# EAGLE board ArduinoConnector (EAGLE 6.1)
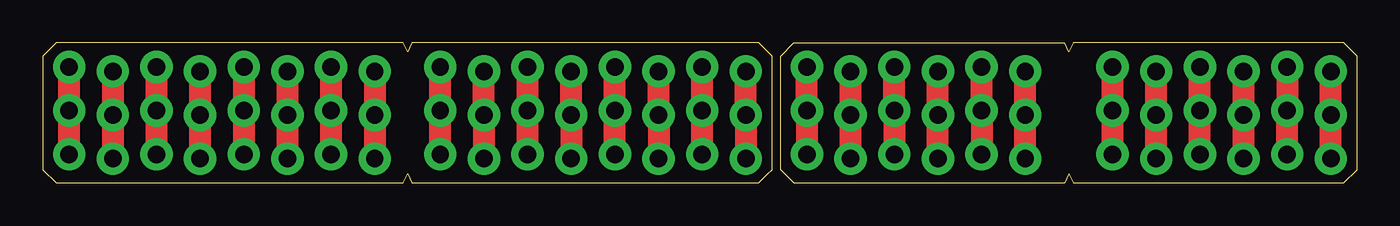
[diagram p0: board, top side]
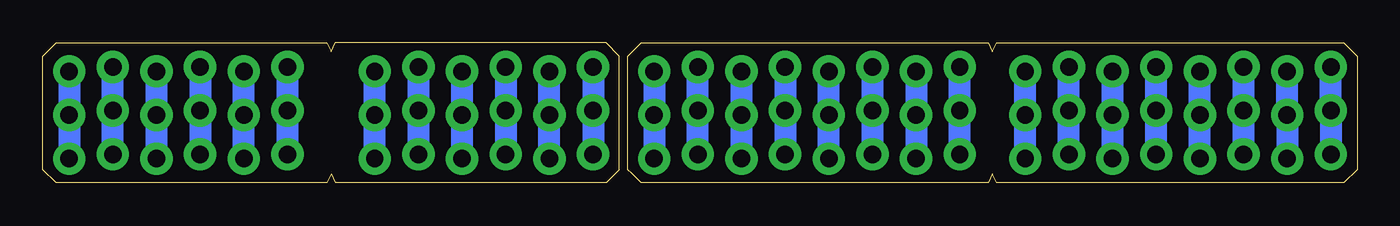
[diagram p1: board, bottom side, seen from below]

Size 76.45 x 8.13 mm. Coordinates in mm from the lower left corner, seen from the top.
Outline: 0.76,8.13 0.25,7.62 0,7.37 0,0.76 0.76,0 20.95,0 21.21,0.51 21.46,0 41.66,0 42.16,0.51 42.42,0.76 42.42,7.37 41.66,8.13 21.46,8.13 21.21,7.62 20.95,8.13 0.76,8.13
Outline: 42.93,0.76 42.93,7.37 43.69,8.13 59.44,8.13 59.69,7.62 59.94,8.13 75.69,8.13 76.45,7.37 76.45,0.76 75.69,0 59.94,0 59.69,0.51 59.44,0 43.69,0 42.93,0.76
Copper layers (1*16): Top 0.0356mm / dielectric 1.5011mm / Bottom 0.0356mm
Design rules: minimum track width 9mil, minimum drill 18mil, track to track 9mil, track to pad 9mil, pad to pad 9mil, via to via 9mil, smd to smd 9mil, copper to edge 10mil, drill to drill 9mil, minimum pad ring 10mil, minimum via ring 8mil, stop-mask expansion 4mil, vias tented up to drill 25mil, thermal gap 10mil

## Footprints (pad centres in the part's own frame; a part is rotated, then mirrored left to right if it is on the bottom)
1X08_LOCK_NOSCREEN = drill 1.016 pad 1.88: 1 0,0.127; 2 2.54,-0.127; 3 5.08,0.127; 4 7.62,-0.127; 5 10.16,0.127; 6 12.7,-0.127; 7 15.24,0.127; 8 17.78,-0.127
1X06_LOCK_NOSCREEN = drill 1.016 pad 1.88: 1 0,0.127; 2 2.54,-0.127; 3 5.08,0.127; 4 7.62,-0.127; 5 10.16,0.127; 6 12.7,-0.127

## Placement (x,y rotation side)
JP1  [1X08_LOCK_NOSCREEN]  23.11,6.6 0 top
JP2  [1X08_LOCK_NOSCREEN]  1.52,6.6 0 top
JP3  [1X06_LOCK_NOSCREEN]  44.45,6.6 0 top
JP4  [1X08_LOCK_NOSCREEN]  23.11,4.06 0 top
JP5  [1X08_LOCK_NOSCREEN]  1.52,4.06 0 top
JP6  [1X08_LOCK_NOSCREEN]  1.52,1.52 0 top
JP7  [1X06_LOCK_NOSCREEN]  44.45,4.06 0 top
JP8  [1X06_LOCK_NOSCREEN]  44.45,1.52 0 top
JP9  [1X08_LOCK_NOSCREEN]  23.11,1.52 0 top
JP10  [1X06_LOCK_NOSCREEN]  62.23,6.6 0 top
JP11  [1X06_LOCK_NOSCREEN]  62.23,4.06 0 top
JP12  [1X06_LOCK_NOSCREEN]  62.23,1.52 0 top

## Library data of the parts
JP1-JP12 = 1dah

## Nets
N$1: JP2.1 JP5.1 JP6.1
N$2: JP2.2 JP5.2 JP6.2
N$3: JP2.3 JP5.3 JP6.3
N$4: JP2.4 JP5.4 JP6.4
N$5: JP2.5 JP5.5 JP6.5
N$6: JP2.6 JP5.6 JP6.6
N$7: JP2.7 JP5.7 JP6.7
N$8: JP2.8 JP5.8 JP6.8
N$9: JP3.1 JP7.1 JP8.1
N$10: JP3.2 JP7.2 JP8.2
N$11: JP3.3 JP7.3 JP8.3
N$12: JP3.4 JP7.4 JP8.4
N$13: JP3.5 JP7.5 JP8.5
N$14: JP3.6 JP7.6 JP8.6
N$23: JP1.1 JP4.1 JP9.1
N$24: JP1.2 JP4.2 JP9.2
N$25: JP1.3 JP4.3 JP9.3
N$26: JP1.4 JP4.4 JP9.4
N$27: JP1.5 JP4.5 JP9.5
N$28: JP1.6 JP4.6 JP9.6
N$29: JP1.7 JP4.7 JP9.7
N$30: JP1.8 JP4.8 JP9.8
N$31: JP10.1 JP11.1 JP12.1
N$32: JP10.2 JP11.2 JP12.2
N$33: JP10.3 JP11.3 JP12.3
N$34: JP10.4 JP11.4 JP12.4
N$35: JP10.5 JP11.5 JP12.5
N$36: JP10.6 JP11.6 JP12.6

## Tracks (layer width: path | path; a pad name or v marks a point on that pad's centre or on a via)
N$1
  Bottom 1.27: JP2.1 JP5.1 JP6.1
N$2
  Bottom 1.27: JP2.2 JP5.2 JP6.2
N$3
  Bottom 1.27: JP6.3 JP5.3 JP2.3
N$4
  Bottom 1.27: JP2.4 JP5.4 JP6.4
N$5
  Bottom 1.27: JP2.5 JP5.5 JP6.5
N$6
  Bottom 1.27: JP2.6 JP5.6 JP6.6
N$7
  Bottom 1.27: JP2.7 JP5.7 JP6.7
N$8
  Bottom 1.27: JP6.8 JP5.8 JP2.8
N$9
  Top 1.27: JP3.1 JP7.1 JP8.1
N$10
  Top 1.27: JP8.2 JP7.2 JP3.2
N$11
  Top 1.27: JP3.3 JP7.3 JP8.3
N$12
  Top 1.27: JP8.4 JP7.4 JP3.4
N$13
  Top 1.27: JP3.5 JP7.5 JP8.5
N$14
  Top 1.27: JP8.6 JP7.6 JP3.6
N$15
  Top 1.27: 1.52,1.52 1.52,6.6
N$16
  Top 1.27: 4.06,6.6 4.06,1.52
N$17
  Top 1.27: 6.6,6.6 6.6,1.52
N$18
  Top 1.27: 9.14,1.27 9.14,6.6
N$19
  Top 1.27: 11.68,6.6 11.68,1.52
N$20
  Top 1.27: 14.22,6.6 14.22,1.52
N$21
  Top 1.27: 16.76,1.52 16.76,6.86
N$22
  Top 1.27: 19.3,6.6 19.3,1.27
N$23
  Top 1.27: JP9.1 JP4.1 JP1.1
N$24
  Top 1.27: JP1.2 JP4.2 JP9.2
N$25
  Top 1.27: JP9.3 JP4.3 JP1.3
N$26
  Top 1.27: JP1.4 JP4.4 JP9.4
N$27
  Top 1.27: JP9.5 JP4.5 JP1.5
N$28
  Top 1.27: JP1.6 JP4.6 JP9.6
N$29
  Top 1.27: JP9.7 JP4.7 JP1.7
N$30
  Top 1.27: JP1.8 JP4.8 JP9.8
N$31
  Top 1.27: JP10.1 JP11.1 JP12.1
N$32
  Top 1.27: JP10.2 JP11.2 JP12.2
N$33
  Top 1.27: JP10.3 JP11.3 JP12.3
N$34
  Top 1.27: JP10.4 JP11.4 JP12.4
N$35
  Top 1.27: JP12.5 JP11.5 JP10.5
N$36
  Top 1.27: JP10.6 JP11.6 JP12.6
N$37
  Bottom 1.27: 23.11,1.52 23.11,6.6
N$38
  Bottom 1.27: 25.65,6.6 25.65,1.27
N$39
  Bottom 1.27: 28.19,6.86 28.19,1.52
N$40
  Bottom 1.27: 30.73,1.27 30.73,6.6
N$41
  Bottom 1.27: 33.27,6.86 33.27,1.52
N$42
  Bottom 1.27: 35.81,6.6 35.81,1.27
N$43
  Bottom 1.27: 38.35,1.52 38.35,6.6
N$44
  Bottom 1.27: 40.89,6.6 40.89,1.27
N$45
  Bottom 1.27: 44.45,6.6 44.45,1.52
N$46
  Bottom 1.27: 46.99,1.52 46.99,6.6
N$47
  Bottom 1.27: 49.53,6.6 49.53,1.52
N$48
  Bottom 1.27: 52.07,1.52 52.07,6.6
N$49
  Bottom 1.27: 54.61,6.6 54.61,1.52
N$50
  Bottom 1.27: 57.15,1.52 57.15,6.6
N$51
  Bottom 1.27: 62.23,6.6 62.23,1.52
N$52
  Bottom 1.27: 64.77,1.52 64.77,6.6
N$53
  Bottom 1.27: 67.31,6.6 67.31,1.52
N$54
  Bottom 1.27: 69.85,6.6 69.85,1.27
N$55
  Bottom 1.27: 72.39,1.52 72.39,6.6
N$56
  Bottom 1.27: 74.93,6.6 74.93,1.27